# Altium PCB ECG_NEMO_final.PcbDoc (part 2 of 2)
Units mm, origin at the board's own origin, x right, y up, seen from the top; angles counter-clockwise.
Board outline 221.18 x 156.18 mm, 4 copper layers (Top Layer, Signal Layer 1, Signal Layer 2, Bottom Layer), stack 0.778 mm thick; 203 components, 106 nets, 642 pads, 55 vias.
Unrouted connection lines stored in the file: 130.
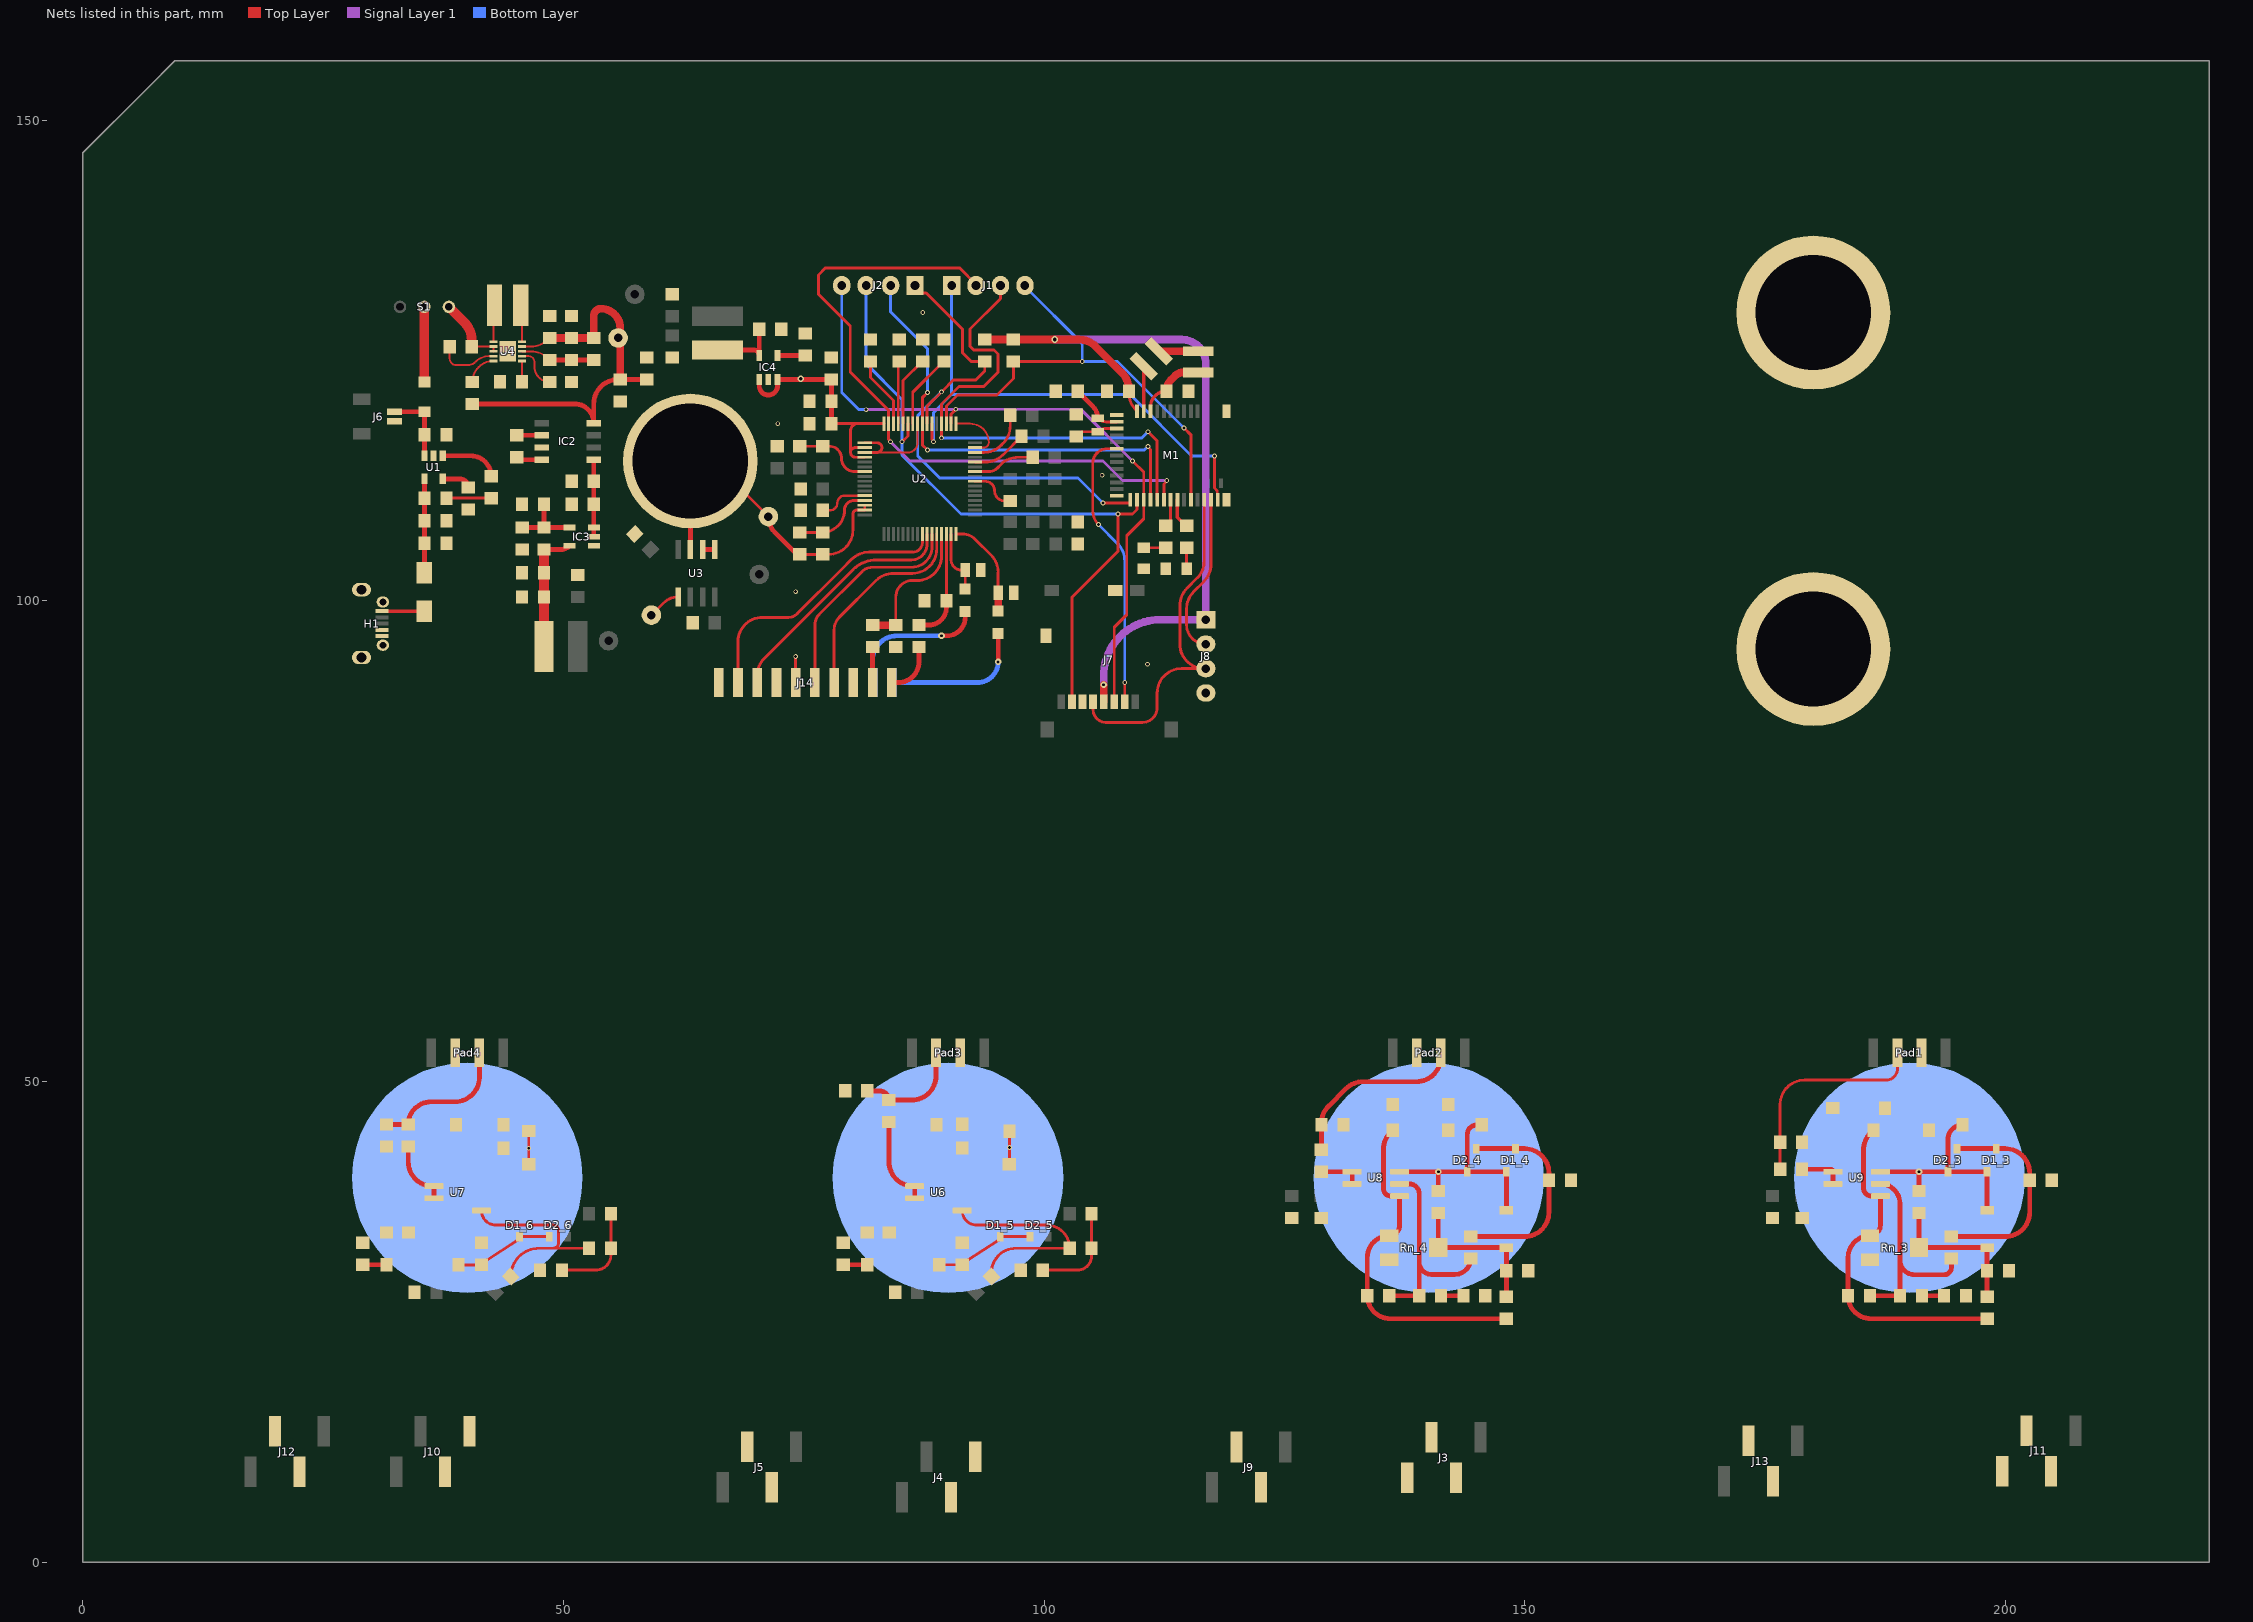
[diagram p3: the nets of this part, all layers, seen from the top]

## Via types
v1: diameter 0.5, hole 0.3, Top Layer to Bottom Layer, 24 vias
v2: diameter 0.5, hole 0.3, Signal Layer 1 to Bottom Layer, 10 vias
v3: diameter 0.5, hole 0.3, Top Layer to Signal Layer 1, 9 vias
v4: diameter 0.7, hole 0.3, Top Layer to Bottom Layer, 6 vias
v5: diameter 0.7, hole 0.4, Top Layer to Signal Layer 1, 3 vias
v6: diameter 0.7, hole 0.4, Top Layer to Bottom Layer, 1 vias
v7: diameter 0.7, hole 0.3, Top Layer to Signal Layer 1, 1 vias
v8: diameter 0.7, hole 0.3, Signal Layer 1 to Bottom Layer, 1 vias

## Nets (pads, with @x,y where several pads share a name; then routed paths per layer and width w, separated by ;. In a path a pad name is that pad's centre, name@x,y a point inside that pad or via, vN(x,y) a via of type N, cw(c..) or ccw(c..) an arc to the next point about the centre after c; other vN are vias at no path point) (continued)
BIAS: C14.2 pad.1 R17.2 TP8.1 U2.62 U2.63 U3.3 | length 35.5
  Top Layer w0.3: pad.1@63.198,114.554 64.471,114.554 cw(c64.471,112.014) 66.267,113.81 TP8.1@71.308,108.769 ; C14.2@74.589,104.848 R17.2@76.964,104.848 77.564,104.848 ccw(c77.564,107.388) 80.104,107.388 80.104,109.042 cw(c80.512,109.042) 80.512,109.45 U2.63@81.336,109.45 U2.62@81.336,109.95
  Top Layer w0.5: U3.3@63.198,105.349 pad.1@63.198,114.554 ; TP8.1@71.308,108.769 ccw(c73.616,108.769) 71.984,107.137 74.049,105.072 ccw(c74.589,105.613) C14.2@74.589,104.848
CS: J2.1 M1.25 R20.1 U2.39 | length 54.5
  Top Layer w0.3: J2.1@86.563,132.817 86.563,132.791 87.313,132.041 87.724,132.041 91.518,128.246 91.518,125.796 92.404,124.909 R20.1@93.821,124.909 93.821,123.922 92.899,123 90.57,123 89.362,121.792 87.824,120.254 U2.39@87.824,118.438 ; v2(106.121,110.185) 108.901,110.185 108.951,110.235 M1.25@108.951,110.536
  Bottom Layer w0.3: v1(89.324,121.754) 86.843,119.273 86.843,115.087 89.129,112.801 103.505,112.801 v2(106.121,110.185)
  other v1: 106.121,110.185
CS_1: J7.2 M1.17 | length 29.3
  Top Layer w0.3: v1(105.639,107.95) cw(c107.049,109.36) 105.054,109.36 105.054,114.342 cw(c106.548,114.342) 106.548,115.836 M1.17@107.551,115.836 ; J7.2@108.382,89.526 v1(108.382,91.516)
  Bottom Layer w0.3: v1(105.639,107.95) 107.638,105.951 cw(c105.842,104.155) 108.382,104.155 v1(108.382,91.516)
  other v2: 105.639,107.95
DRDY: J1.2 M1.30 U2.47 | length 70.5
  Top Layer w0.3: v3(84.023,116.561) 84.023,116.615 83.824,116.814 U2.47@83.824,118.438 83.824,119.808 79.825,123.806 79.825,128.588 76.516,131.897 76.516,133.912 77.224,134.62 91.21,134.62 92.913,132.917 J1.2@92.913,132.817 ; M1.30@112.451,110.536 112.451,112.168 112.751,112.468 v1(112.751,112.522)
  Signal Layer 1 w0.3: v3(84.023,116.561) 86.03,114.554 106.121,114.554 108.153,112.522 v1(112.751,112.522)
  other v2: 112.751,112.522
DVDD: C15.2 C16.2 C30.2 C31.2 C39.2 C40.2 C46.2 C47.2 IC2.8 IC4.1 IC4.3 J7.4 J8.1 M1.11 R15.2 R16.2 R19.2 R20.2 TP7.1 U2.48 U2.50 U2.52 U4.9 | length 149.8
  Top Layer w0.2: U4.9@45.674,126.462 46.629,126.462 ccw(c46.629,129.002) 48.425,127.206 C16.2@48.575,127.356
  Top Layer w0.3: C31.2@77.866,118.438 80.595,118.438 ; U2.52@81.336,114.95 80.358,114.95 cw(c80.358,115.45) 79.858,115.45 ; U2.50@81.336,115.95 80.358,115.95 ccw(c80.358,115.45) 79.858,115.45 ; U2.48@83.324,118.438 80.595,118.438 ; C46.2@108.814,121.96 C46.2@108.814,121.823 108.814,121.625 ccw(c111.354,121.625) 109.558,119.829 M1.11@109.651,119.736 ; 79.858,115.45 79.858,117.701 cw(c80.595,117.701) 80.595,118.438
  Top Layer w0.5: R16.2@40.532,120.498 51.147,120.498 cw(c51.147,118.496) IC2.8@53.149,118.496 53.149,120.498 cw(c55.689,120.498) 55.689,123.038 C40.2@55.895,123.038 C39.2@58.649,123.038 ; IC4.1@70.358,123.038 70.358,122.362 ccw(c71.308,122.362) 71.308,121.412 ccw(c71.308,122.362) 72.258,122.362 IC4.3@72.258,123.038 C30.2@77.866,123.038 C47.2@77.866,120.769 C31.2@77.866,118.438
  Top Layer w0.8: C16.2@48.575,127.356 C15.2@50.83,127.356 R15.2@53.149,127.356 53.149,129.634 cw(c53.911,129.634) 53.911,130.396 cw(c53.911,128.412) 55.895,128.412 C40.2@55.895,123.038 ; R20.2@93.821,127.195 R19.2@96.793,127.195 v5(101.089,127.195) 103.578,127.195 cw(c103.578,124.655) 105.374,126.452 108.07,123.756 cw(c106.274,121.96) C46.2@108.814,121.96 ; J7.4@106.182,89.526 v7(106.182,91.288)
  Signal Layer 1 w0.8: v5(101.089,127.195) 114.275,127.195 cw(c114.275,124.655) 116.815,124.655 J8.1@116.815,98.044 112.039,98.044 ccw(c112.039,92.186) 106.182,92.186 v7(106.182,91.288)
  other v5: 74.678,123.106
Elec_1: C5.2 R5.2 U2.14 | length 11.5
  Top Layer w0.3: C5.2@89.824,100.025 U2.14@89.824,106.962
  Top Layer w0.5: R5.2@86.974,97.485 88,97.485 ccw(c88,99.308) 89.824,99.308 C5.2@89.824,100.025
Elec_2: C6.2 R6.2 U2.13 | length 14.8
  Top Layer w0.3: C6.2@84.562,97.485 84.562,100.406 cw(c86.284,100.406) 86.284,102.128 86.784,102.128 ccw(c86.784,104.668) 89.324,104.668 U2.13@89.324,106.962
  Top Layer w0.8: R6.2@82.149,97.485 C6.2@84.562,97.485
Elec_3: C7.2 J14.7 Pad1.3 R7.2 U2.12 | length 44.6
  Top Layer w0.3: J14.7@78.149,91.516 78.149,96.994 cw(c79.993,96.994) 78.689,98.298 82.519,102.128 cw(c84.315,100.332) 84.315,102.872 86.284,102.872 ccw(c86.284,105.412) 88.824,105.412 U2.12@88.824,106.962 ; R7.2@176.547,40.889 C7.2@176.547,43.688 176.547,47.625 cw(c179.087,47.625) 179.087,50.165 187.554,50.165 ccw(c187.554,51.361) 188.75,51.361 Pad1.3@188.75,53
Elec_4: C8.2 J14.9 Pad2.2 R8.2 U2.11 | length 42.7
  Top Layer w0.3: J14.9@76.149,91.516 76.149,97.529 cw(c77.642,97.529) 76.586,98.585 81.069,103.068 cw(c82.125,102.012) 82.125,103.505 86.216,103.505 ccw(c86.216,105.613) 88.324,105.613 U2.11@88.324,106.962
  Top Layer w0.5: R8.2@128.833,42.921 C8.2@128.833,45.5 128.833,45.662 cw(c131.373,45.662) 129.577,47.458 131.375,49.256 cw(c133.171,47.46) 133.171,50 138.71,50 ccw(c138.71,52.54) 141.25,52.54 Pad2.2@141.25,53
Elec_5: C63.2 J14.15 Pad3.3 R27.2 U2.10 | length 37.3
  Top Layer w0.3: J14.15@70.149,91.516 70.149,92.236 cw(c72.689,92.236) 70.893,94.033 80.13,103.269 cw(c82.539,100.86) 82.539,104.267 86.166,104.267 ccw(c86.166,105.925) 87.824,105.925 U2.10@87.824,106.962
  Top Layer w0.5: C63.2@81.592,49.04 82.892,49.04 cw(c82.892,48.081) R27.2@83.851,48.081 86.21,48.081 ccw(c86.21,50.621) 88.75,50.621 Pad3.3@88.75,53
Elec_6: C64.2 J14.17 Pad4.2 R28.2 U2.9 | length 44
  Top Layer w0.3: J14.17@68.149,91.516 68.149,95.758 cw(c70.689,95.758) 70.689,98.298 73.399,98.298 ccw(c73.399,99.603) 74.323,98.68 78.901,103.259 79.97,104.328 cw(c81.766,102.532) 81.766,105.072 86.317,105.072 ccw(c86.317,106.078) 87.324,106.077 U2.9@87.324,106.962
  Top Layer w0.5: C64.2@31.592,45.541 R28.2@33.851,45.541 cw(c36.213,45.541) 36.213,47.903 38.71,47.903 ccw(c38.71,50.443) 41.25,50.443 Pad4.2@41.25,53
Elec_7: C52.2 R3.1 U2.16 | length 10.5
  Top Layer w0.3: U2.16@90.824,106.962 91.518,106.962 cw(c91.518,105.132) 92.812,106.426 94.47,104.768 cw(c92.674,102.972) 95.214,102.972 C52.2@95.214,100.86
  Top Layer w0.8: R3.1@95.214,98.965 C52.2@95.214,100.86
Elec_8: C67.2 R4.1 U2.15 | length 6.7
  Top Layer w0.3: U2.15@90.324,106.962 90.324,104.266 ccw(c91.364,104.266) 91.364,103.226 C67.2@91.784,103.226 R4.1@91.784,101.251
GND: C1.1 C1_3.2 C1_4.2 C1_5.2 C1_6.2 C2.1 C3.1 C4.1 C5.1 C6.1 C7.1 C8.1 C9.1 C10.1 C11.1 C12.2 C13.1 C15.1 C16.1 C17.1 C18.1 C19.1 C28.1 C29.1 C30.1 C31.1 C34.1 C35.1 C37.2 C38.1 C39.1 C40.1 C41.1 C42.1 C43.1 C44.1 C45.1 C46.1 C47.1 C48.1 C49.1 C50.1 C51.1 C52.1 C53.1 C54.1 C57.1 C58.1 C61.1 C62.1 C63.1 C64.1 C65.1 C66.1 C67.1 C69.1 C70.1 C73.1 C74.1 C75.1 C79.1 H1.4 H1.5 IC2.3 IC3.1 IC4.2 J6.2 J7.6 J7.DL J7.DS J8.4 J14.5 J14.11 J14.13 J14.19 LED2.K LED3.K M1.1 M1.12 M1.24 M1.39 Pad1.2 Pad2.3 Pad3.2 Pad4.3 R2.1 R3_3.1 R3_4.1 R9.2 R11.2 R12.2 R13.2 R14.2 R18.1 R23.1 R25.1 R29.2 Rb_3.1 Rb_4.1 Rb_5.1 Rb_6.1 Rn2.1 Rn2_3.1 Rn2_4.1 Rn2_5.1 Rn_3.3 Rn_4.3 U1.2 U2.31 U2.33 U2.41 U2.49 U2.51 U4.4 U4.7 U4.11 | length 31
  Top Layer w0.2: C17.1@38.163,126.462 38.163,125.211 ccw(c38.837,125.211) 38.837,124.537 40.024,124.537 ccw(c40.024,125.732) 40.869,124.887 cw(c42.257,123.498) 42.257,125.462 U4.4@42.724,125.462 ; U4.7@45.674,125.462 46.39,125.462 cw(c46.39,124.887) 46.965,124.887 46.965,124.394 ccw(c48.575,124.394) R18.1@48.575,122.784 ; 82.616,115.45 85.824,115.45 ccw(c85.824,116.45) 86.824,116.45 U2.41@86.824,118.438 ; U2.33@90.824,118.438 92.295,118.438 cw(c92.295,116.495) 94.238,116.495 cw(c93.692,116.495) 93.692,115.95 U2.31@92.812,115.95
  Top Layer w0.3: J14.11@74.149,91.516 v1(74.149,94.228) ; U2.51@81.336,115.45 82.616,115.45 ccw(c82.616,115.95) 83.116,115.95 ccw(c82.616,115.95) 82.616,116.45 U2.49@81.336,116.45
  other v1: 110.732,93.416 74.149,100.964 106.028,113.072 72.283,118.438 87.37,130
GUARD_3: J11.2 R1_3.1 R2_3.2 Rc_3.1 U9.2 | length 23.5
  Top Layer w0.5: R1_3.1@185.892,27.737 R2_3.2@189,27.737 189,31.447 ; U9.2@186.97,39.365 cw(c186.97,37.335) 189,37.335 189,31.447 ; Rc_3.1@194.36,31.598 194.36,30.682 cw(c193.599,30.682) 193.599,29.921 190.525,29.921 cw(c190.525,31.447) 189,31.447
GUARD_4: J3.2 R1_4.1 R2_4.2 Rc_4.1 U8.2 | length 23.4
  Top Layer w0.5: R1_4.1@135.892,27.737 R2_4.2@139,27.737 139,31.243 ; U8.2@136.97,39.365 137.984,39.365 cw(c137.984,38.349) 139,38.349 139,31.243 ; Rc_4.1@144.36,31.598 cw(c142.709,31.598) 142.709,29.947 140.296,29.947 cw(c140.296,31.243) 139,31.243
GUARD_5: R24.1
GUARD_6: R26.1
MISO: J2.3 J7.7 M1.26 U2.43 | length 71
  Top Layer w0.3: v1(85.217,116.561) 85.824,117.167 U2.43@85.824,118.438 ; J7.7@102.882,89.526 102.882,100.384 107.671,105.173 v1(107.671,109.05) 109.191,109.05 109.651,109.51 M1.26@109.651,110.536
  Bottom Layer w0.3: J2.3@81.483,132.817 81.483,124.669 85.217,120.935 v1(85.217,116.561) 85.217,115.164 91.331,109.05 v1(107.671,109.05)
  other v2: 107.671,109.05
  other v3: 85.217,116.561
MOSI: J2.4 J7.3 M1.27 U2.34 | length 72.9
  Top Layer w0.3: U2.34@90.324,118.438 90.324,119.457 v2(90.805,119.939) ; J7.3@107.282,89.526 107.282,97.274 108.582,98.574 108.582,106.784 110.351,108.554 110.351,113.398 v3(109.195,114.554)
  Signal Layer 1 w0.3: v2(81.483,119.898) 90.764,119.898 v2(90.805,119.939) 103.81,119.939 v3(109.195,114.554)
  Bottom Layer w0.3: J2.4@78.943,132.817 78.943,121.666 80.712,119.898 v2(81.483,119.898)
  other v3: 90.805,119.939
NetC1_3_1: C1_3.1 R2_3.1 | length 2.3
  Top Layer w0.5: R2_3.1@191.286,27.737 C1_3.1@193.598,27.737
NetC1_4_1: C1_4.1 R2_4.1 | length 2.3
  Top Layer w0.5: R2_4.1@141.286,27.737 C1_4.1@143.598,27.737
NetC1_5_1: C1_5.1 R2_5.1 | length 2.5
  Top Layer w0.5: C1_5.1@79.108,30.96 R2_5.1@81.592,30.96
NetC1_6_1: C1_6.1 R2_6.1 | length 2.5
  Top Layer w0.5: C1_6.1@29.108,30.951 31.592,30.951 R2_6.1@31.592,30.96
NetC9_2: C9.2 C10.2 D2.1 LED1.1 U1.4 | length 9.8
  Top Layer w0.5: D2.1@35.531,102.946 C10.2@35.531,105.994 C9.2@35.531,108.33 LED1.1@35.531,110.693 U1.4@35.531,112.699
NetC11_2: C11.2 D1.2 J6.1 U1.3 | length 7.7
  Top Layer w0.5: J6.1@32.415,119.68 32.415,119.684 D1.2@35.531,119.684 C11.2@35.531,117.308 U1.3@35.531,115.099
NetC14_1: C14.1 R17.1 U2.61 | length 8.6
  Top Layer w0.3: C14.1@74.589,107.134 76.912,107.134 ccw(c76.912,109.45) 79.228,109.45 cw(c80.228,109.45) 80.228,110.45 U2.61@81.336,110.45
NetC18_2: C18.2 U4.6 | length 2.2
  Top Layer w0.2: C18.2@45.674,122.784 U4.6@45.674,124.962
NetC19_2: C19.2 R15.1 R18.2 U4.8 | length 7.7
  Top Layer w0.2: U4.8@45.674,125.962 46.631,125.962 cw(c46.631,123.422) 48.427,125.218 R18.2@48.575,125.07
  Top Layer w0.5: R18.2@48.575,125.07 C19.2@50.83,125.07 R15.1@53.149,125.07
NetC20_1: C20.1 U2.24 | length 4.8
  Top Layer w0.3: U2.24@92.812,112.45 93.844,112.45 cw(c93.844,111.45) 94.844,111.45 ccw(c95.884,111.45) 95.884,110.41 C20.1@96.469,110.41
NetC21_2: C21.2 U2.30 | length 6.3
  Top Layer w0.3: U2.30@92.812,115.45 93.727,115.45 ccw(c93.727,117.99) 95.523,116.194 95.725,116.396 ccw(c93.929,118.192) 96.469,118.192 C21.2@96.469,119.305
NetC22_1: C22.1 U2.28 | length 5.8
  Top Layer w0.3: U2.28@92.812,114.45 93.912,114.45 ccw(c93.912,116.99) 95.708,115.194 C22.1@97.637,117.123
NetC23_2: C23.2 U2.26 | length 6.4
  Top Layer w0.3: U2.26@92.812,113.45 94.238,113.45 ccw(c94.238,114.679) 95.107,113.81 95.494,114.197 cw(c97.291,112.401) 97.291,114.941 C23.2@98.805,114.941
NetC24_2: C24.2 C25.2 U2.55 | length 8.3
  Top Layer w0.3: C25.2@74.589,116.096 C24.2@76.964,116.096 77.65,116.096 cw(c77.65,114.834) 78.911,114.834 ccw(c80.296,114.834) 80.296,113.45 U2.55@81.336,113.45
NetC36_1: C36.1 IC2.2 | length 2.6
  Top Layer w0.5: C36.1@45.129,117.226 IC2.2@47.727,117.226
NetC36_2: C36.2 IC2.4 | length 2.7
  Top Layer w0.5: C36.2@45.129,114.94 ccw(c45.383,114.94) 45.383,114.686 IC2.4@47.727,114.686
NetC37_1: C37.1 IC3.4 R1.1 R2.2 | length 7.4
  Top Layer w0.5: C37.1@45.713,107.635 R1.1@47.974,107.635 ; R2.2@47.974,110.078 R1.1@47.974,107.635 ; IC3.4@50.649,107.635 R1.1@47.974,107.635
NetC38_2: C38.2 L3.2 M1.9 | length 7.4
  Top Layer w0.35: M1.9@111.051,119.736 111.051,120.166 cw(c112.708,120.166) C38.2@112.708,121.823
  Top Layer w0.8: C38.2@112.708,121.823 cw(c114.372,121.823) 113.196,123 113.64,123.444 cw(c114.418,122.666) 114.418,123.766 L3.2@116.013,123.766
NetC41_2: C41.2 C42.2 IC2.5 IC3.2 IC3.3 | length 8
  Top Layer w0.5: IC3.2@53.149,106.685 IC3.3@53.149,107.635 C42.2@53.149,110.078 C41.2@53.149,112.44 IC2.5@53.149,114.686
NetC43_2: C43.2 C44.2 IC3.5 L2.1 R1.2 | length 12.9
  Top Layer w0.5: R1.2@47.974,105.349 49.717,105.349 ccw(c49.717,106.667) IC3.5@50.649,105.735
  Top Layer w1: L2.1@47.974,95.275 C44.2@47.974,100.411 C43.2@47.974,102.912 R1.2@47.974,105.349
NetC48_2: C48.2 IC4.5 L5.1 | length 7.4
  Top Layer w0.5: L5.1@66.015,126.111 69.784,126.111 cw(c69.784,125.538) IC4.5@70.358,125.538 C48.2@70.358,128.27
NetC51_2: C51.2 IC4.4 | length 2.9
  Top Layer w0.5: IC4.4@72.258,125.538 C51.2@75.159,125.538
NetC53_2: C53.2 M1.13 X1.2 | length 5.7
  Top Layer w0.305: X1.2@105.571,119.002 ccw(c106.455,119.887) 106.455,118.636 M1.13@107.551,118.636
  Top Layer w0.5: C53.2@103.48,121.823 105.054,120.248 cw(c103.808,119.002) X1.2@105.571,119.002
NetC54_2: C54.2 M1.14 X1.1 | length 4.5
  Top Layer w0.305: C54.2@103.335,117.094 103.399,117.094 103.907,117.602 X1.1@105.571,117.602 cw(c106.376,116.797) 106.376,117.936 M1.14@107.551,117.936
NetCn_1: Cn.1 Rn1.1 Rn2.2 | length 10.3
  Top Layer w0.3: Rn2.2@49.852,30.392 53.348,30.392 ccw(c53.348,31.976) 54.932,31.976 Rn1.1@54.932,32.678 Cn.1@54.932,36.276
NetCn_3_1: Cn_3.1 Cn_3a.2 Rn1_3.1 Rn2_3.2 Rn_3.2 | length 15.8
  Top Layer w0.5: Cn_3.1@190.992,36.349 Rn_3.2@190.992,32.741 Cn_3a.2@198.068,32.741 Rn2_3.2@198.068,30.344 Rn1_3.1@198.068,27.635
NetCn_4_1: Cn_4.1 Cn_4a.2 Rn1_4.1 Rn2_4.2 Rn_4.2 | length 15.8
  Top Layer w0.5: Cn_4.1@140.992,36.349 Rn_4.2@140.992,32.741 Cn_4a.2@148.068,32.741 Rn2_4.2@148.068,30.344 Rn1_4.1@148.068,27.635
NetCn_5_1: Cn_5.1 Rn1_5.1 Rn2_5.2 | length 10.3
  Top Layer w0.3: Rn2_5.2@99.852,30.392 103.447,30.392 ccw(c103.447,31.877) 104.932,31.877 Rn1_5.1@104.932,32.678 Cn_5.1@104.932,36.276
NetD1_1: D1.1 S1.2 | length 7.8
  Top Layer w1: D1.1@35.531,122.784 S1.2@35.531,130.593
NetD1_3_3: D1_3.3 D2_3.1 Rb_3.2 Rc_3.2 | length 22.7
  Top Layer w0.5: Rc_3.2@194.36,33.884 199.96,33.884 ccw(c199.96,36.424) 202.5,36.424 Rb_3.2@202.5,39.75 202.5,40.495 ccw(c199.96,40.495) 199.96,43.035 D1_3.3@199.018,43.035 D2_3.1@194.95,43.035
NetD1_4_3: D1_4.3 D2_4.1 Rb_4.2 Rc_4.2 | length 22.7
  Top Layer w0.5: Rc_4.2@144.36,33.884 149.96,33.884 ccw(c149.96,36.424) 152.5,36.424 Rb_4.2@152.5,39.75 152.5,40.495 ccw(c149.96,40.495) 149.96,43.035 D1_4.3@149.018,43.035 D2_4.1@144.95,43.035
NetD1_5_3: D1_5.3 D2_5.1 Rb_5.2 Rc_5.2 | length 10.4
  Top Layer w0.3: Rc_5.2@89.081,30.96 Rb_5.2@91.47,30.96 92.019,31.445 95.231,33.526 D1_5.3@95.431,33.876 D2_5.1@98.52,33.876
NetD1_6_3: D1_6.3 D2_6.1 Rb_6.2 Rc_6.2 | length 10.4
  Top Layer w0.3: Rc_6.2@39.081,30.951 Rb_6.2@41.47,30.951 42.018,31.436 45.231,33.526 D1_6.3@45.431,33.876 D2_6.1@48.52,33.876
NetD2_2: D2.2 H1.1 | length 4.4
  Top Layer w0.35: H1.1@31.115,98.946 D2.2@35.531,98.946
NetL1_1: L1.1 U4.1 | length 3.9
  Top Layer w0.2: U4.1@42.724,126.962 42.724,130.667 cw(c42.827,130.667) L1.1@42.827,130.77
NetL1_2: L1.2 U4.10 | length 3.9
  Top Layer w0.2: L1.2@45.539,130.771 cw(c45.539,130.635) 45.674,130.635 U4.10@45.674,126.962
NetL3_1: L3.1 L4.2 | length 4.1
  Top Layer w0.8: L4.2@111.907,125.966 L3.1@116.013,125.966
NetL4_1: L4.1 M1.10 | length 4.7
  Top Layer w0.35: M1.10@110.351,119.736 L4.1@110.351,124.411
NetLED1_2: LED1.2 R10.1 | length 4.7
  Top Layer w0.3: LED1.2@37.817,110.693 R10.1@42.477,110.693
NetLED2_A: LED2.A R21.2 | length 2.2
  Top Layer w0.3: LED2.A@114.811,103.353 R21.2@114.811,105.537
NetLED3_A: LED3.A R22.2 | length 2.3
  Top Layer w0.3: LED3.A@110.351,105.537 R22.2@112.627,105.537
NetM1_31: M1.31 R22.1 | length 3
  Top Layer w0.3: R22.1@112.627,107.823 112.666,107.823 113.151,108.308 M1.31@113.151,110.536
NetM1_32: M1.32 R21.1 | length 3.1
  Top Layer w0.35: M1.32@113.851,110.536 113.851,108.72 114.748,107.823 R21.1@114.811,107.823
NetR9_1: R9.1 U1.5 | length 3.2
  Top Layer w0.5: U1.5@37.431,112.699 39.207,112.699 cw(c39.207,111.81) R9.1@40.096,111.81
NetR10_2: R10.2 U1.1 | length 6.3
  Top Layer w0.5: U1.1@37.431,115.099 40.356,115.099 cw(c40.356,112.979) R10.2@42.477,112.979
NetR11_1: R11.1 U2.46 | length 7.5
  Top Layer w0.3: R11.1@81.934,124.909 81.934,123.233 84.324,120.844 U2.46@84.324,118.438
NetR12_1: R12.1 U2.45 | length 6.5
  Top Layer w0.3: U2.45@84.824,118.438 84.824,124.827 R12.1@84.906,124.909
NetR13_1: R13.1 U2.44 | length 7.4
  Top Layer w0.3: U2.44@85.324,118.438 85.324,122.927 87.306,124.909 R13.1@87.37,124.909
NetR14_1: R14.1 U2.42 | length 7.9
  Top Layer w0.3: U2.42@86.324,118.438 86.324,121.717 89.516,124.909 R14.1@89.58,124.909
NetR16_1: R16.1 U4.5 | length 3.4
  Top Layer w0.2: R16.1@40.532,122.784 cw(c42.71,122.784) 42.71,124.962 U4.5@42.724,124.962
NetR29_1: R29.1 U2.60 | length 5.2
  Top Layer w0.254: R29.1@76.964,109.423 77.701,109.423 ccw(c77.701,110.211) 78.488,110.211 cw(c79.228,110.211) 79.228,110.95 U2.60@81.336,110.95
NetU3_1: U3.1 U3.2 | length 1.3
  Top Layer w0.5: U3.2@64.468,105.349 U3.1@65.738,105.349
OUT_A3: C3_3.2 J11.1 R1_3.2 Rn1_3.2 Rn_3.1 U9.1 | length 36.7
  Top Layer w0.5: C3_3.2@186.25,44.964 185.961,44.675 ccw(c187.757,42.879) 185.217,42.879 185.217,38.938 ccw(c186.06,38.938) 186.06,38.095 U9.1@186.97,38.095 186.97,35.069 cw(c185.892,35.069) Rn_3.1@185.892,33.991 ccw(c185.892,31.705) 183.606,31.705 R1_3.2@183.606,27.737 ccw(c185.994,27.737) 185.994,25.349 Rn1_3.2@198.068,25.349
OUT_A4: C3_4.2 J3.1 R1_4.2 Rn1_4.2 Rn_4.1 U8.1 | length 36.6
  Top Layer w0.5: C3_4.2@136.25,44.964 136.024,44.739 ccw(c137.82,42.943) 135.28,42.943 135.28,38.887 ccw(c136.073,38.887) 136.073,38.095 U8.1@136.97,38.095 136.97,35.069 cw(c135.892,35.069) Rn_4.1@135.892,33.991 ccw(c135.892,31.705) 133.606,31.705 R1_4.2@133.606,27.737 ccw(c135.993,27.737) 135.993,25.349 Rn1_4.2@148.068,25.349
OUT_A5: J4.1 J4.2 R1_5.2 Rn1_5.2 U6.1 | length 23.8
  Top Layer w0.3: U6.1@91.47,36.595 ccw(c92.988,36.595) 92.988,35.077 100.247,35.077 cw(c100.247,32.678) Rn1_5.2@102.646,32.678 97.052,32.678 ccw(c97.052,30.138) 94.512,30.138 R1_5.2@94.512,29.723 R1_5.2@94.512,29.32
OUT_A6: J10.1 J10.2 R1_6.2 Rn1.2 U7.1 | length 21.2
  Top Layer w0.3: U7.1@41.47,36.595 ccw(c42.989,36.595) 42.989,35.076 48.962,35.076 cw(c48.962,34.568) 49.47,34.568 49.47,33.186 cw(c48.962,33.186) 48.962,32.678 ; R1_6.2@44.512,29.723 cw(c47.468,29.723) 47.468,32.678 Rn1.2@52.646,32.678
PWDN: J1.4 M1.34 R19.1 U2.35 | length 50.5
  Top Layer w0.3: U2.35@89.824,118.438 89.824,120.269 90.988,121.434 95.077,121.434 96.793,123.15 R19.1@96.793,124.909 v1(103.955,124.909) ; v1(114.554,117.983) 115.251,117.286 M1.34@115.251,110.536
  Bottom Layer w0.3: J1.4@97.993,132.817 97.993,132.717 103.955,126.755 v1(103.955,124.909) 107.628,124.909 v1(114.554,117.983)
  other v3: 114.554,117.983
REF_IN: TP6.1 U3.5 | length 3.5
  Top Layer w0.3: TP6.1@59.142,98.524 60.412,99.794 cw(c61.928,98.278) U3.5@61.928,100.422
RESET: J1.3 M1.29 U2.36 | length 52.7
  Top Layer w0.3: v3(89.324,116.967) U2.36@89.324,118.438 89.324,120.477 91.15,122.303 93.714,122.303 95.191,123.781 95.191,125.682 94.763,126.111 92.674,126.111 92.295,126.489 92.295,128.284 95.453,131.442 J1.3@95.453,132.817 ; v2(110.795,117.602) 111.751,116.646 M1.29@111.751,110.536
  Bottom Layer w0.3: v3(89.324,116.967) 110.16,116.967 v2(110.795,117.602)
  other v1: 89.324,116.967 110.795,117.602
SCK: J2.2 M1.28 U2.40 | length 47.9
  Top Layer w0.3: v1(87.859,115.697) 87.324,116.232 U2.40@87.324,118.438 87.324,121.131 v3(87.859,121.666) ; v1(110.795,116.078) 110.795,116.024 111.051,115.768 M1.28@111.051,110.536
  Bottom Layer w0.3: J2.2@84.023,132.817 84.023,130.073 87.859,126.238 v3(87.859,121.666) ; v1(87.859,115.697) 110.414,115.697 v1(110.795,116.078)
  other v1: 87.859,121.666
  other v2: 110.795,116.078
  other v3: 87.859,115.697
Signal_1: J14.1 pad.1P R5.1 | length 5.6
  Top Layer w0.5: J14.1@84.149,91.516 84.824,91.516 ccw(c84.824,93.667) 86.974,93.667 R5.1@86.974,95.199
Signal_2: J14.3 pad.1N R6.1 | length 3.7
  Top Layer w0.5: J14.3@82.149,91.516 R6.1@82.149,95.199
Signal_3: C_test3.1 Cn_3.2 Cn_3a.1 D1_3.1 D2_3.3 J11.3 pad.2P U9.3 | length 22.8
  Top Layer w0.5: U9.3@186.97,40.635 v4(190.992,40.635) ; Cn_3.2@190.992,38.635 v4(190.992,40.635) ; C_test3.1@195.5,45.5 ccw(c195.5,44) 194,44 D2_3.3@194,40.635 ; Cn_3a.1@198.068,36.641 D1_3.1@198.068,40.635 D2_3.3@194,40.635 ; v4(190.992,40.635) D2_3.3@194,40.635
Signal_3_1: J13.2 J13.3 R7.1 U9.6 U9.7 | length 4.6
  Top Layer w0.5: R7.1@178.833,40.889 181.776,40.889 cw(c181.776,40.635) U9.6@182.03,40.635 U9.7@182.03,39.365
Signal_4: C_test4.1 Cn_4.2 Cn_4a.1 D1_4.1 D2_4.3 J3.3 pad.2N U8.3 | length 23
  Top Layer w0.5: U8.3@136.97,40.635 v4(140.992,40.635) ; Cn_4.2@140.992,38.635 v4(140.992,40.635) ; C_test4.1@145.5,45.5 145,45.5 ccw(c145,44.5) 144,44.5 D2_4.3@144,40.635 ; Cn_4a.1@148.068,36.641 D1_4.1@148.068,40.635 D2_4.3@144,40.635 ; v4(140.992,40.635) D2_4.3@144,40.635
Signal_4_1: J9.2 J9.3 R8.1 U8.6 U8.7 | length 4.5
  Top Layer w0.5: R8.1@128.833,40.635 U8.6@132.03,40.635 U8.7@132.03,39.365
Signal_5: C55.1 C_test5.2 pad.3P | length 3.4
  Top Layer w0.3: C55.1@96.381,41.421 v1(96.381,43.138) C_test5.2@96.381,44.855
Signal_5_1: J5.2 J5.3 R27.1 U6.6 U6.7 | length 9.5
  Top Layer w0.5: R27.1@83.851,45.795 83.851,41.675 ccw(c86.391,41.675) 86.391,39.135 U6.6@86.53,39.135 U6.7@86.53,37.865
Signal_6: C59.2 C_test6.2 pad.3N | length 3.4
  Top Layer w0.254: C59.2@46.381,41.421 C_test6.2@46.381,44.855
  other v1: 46.381,43.077
Signal_6_1: J12.2 J12.3 R28.1 U7.6 U7.7 | length 7
  Top Layer w0.5: R28.1@33.851,43.255 33.851,41.675 ccw(c36.391,41.675) 36.391,39.135 U7.6@36.53,39.135 U7.7@36.53,37.865
Signal_7: J14.2 R3.2 | length 15.2
  Top Layer w0.5: v4(95.214,93.667) R3.2@95.214,96.615
  Bottom Layer w0.5: J14.2@84.149,91.516 93.063,91.516 ccw(c93.063,93.667) v4(95.214,93.667)
Signal_8: J14.4 R4.2 | length 15.1
  Top Layer w0.5: v4(89.324,96.376) 89.862,96.376 ccw(c89.862,98.298) 91.784,98.298 R4.2@91.784,98.901
  Bottom Layer w0.5: J14.4@82.149,91.516 82.149,93.836 cw(c84.689,93.836) 84.689,96.376 v4(89.324,96.376)
START: J1.1 M1.38 U2.38 | length 53.6
  Top Layer w0.3: U2.38@88.324,118.438 88.324,116.785 88.494,116.615 v2(88.494,116.561) ; v3(117.704,115.087) 117.704,111.738 118.001,111.441 118.001,110.586 M1.38@118.051,110.536
  Bottom Layer w0.3: v2(88.494,116.561) 88.494,119.583 90.373,121.463 ; J1.1@90.373,132.817 90.373,121.463 ; v3(117.704,115.087) 115.316,115.087 108.941,121.463 90.373,121.463
  other v1: 117.704,115.087 88.494,116.561
SWD_CLK: J7.5 J8.3 M1.36 | length 37
  Top Layer w0.3: J7.5@105.082,89.526 105.082,88.695 ccw(c106.401,88.695) 106.401,87.376 110.227,87.376 ccw(c110.227,88.9) 111.751,88.9 111.751,90.424 cw(c114.291,90.424) 114.291,92.964 J8.3@116.651,92.964 ; M1.36@116.651,110.536 116.651,104.176 cw(c114.111,104.176) 115.907,102.38 114.855,101.327 ccw(c116.651,99.531) 114.111,99.531 114.111,95.504 ccw(c116.651,95.504) J8.3@116.651,92.964 ; J8.3@116.815,92.964 J8.3@116.651,92.964
SWDIO: J8.2 M1.37 | length 17
  Top Layer w0.3: J8.2@116.815,95.504 cw(c116.815,97.508) 114.811,97.508 114.811,99.179 cw(c117.351,99.179) 115.555,100.975 116.607,102.027 ccw(c114.811,103.824) 117.351,103.824 M1.37@117.351,110.536
VCC: C17.2 S1.3 U4.2 U4.3 | length 7.8
  Top Layer w0.2: C17.2@40.449,126.462 U4.2@42.724,126.462 U4.3@42.724,125.962
  Top Layer w1: S1.3@38.071,130.593 39.705,128.959 cw(c37.909,127.163) 40.449,127.163 C17.2@40.449,126.462
pads on no net: C_test3.2 C_test4.2 C_test5.1 C_test6.1 D1_3.2 D1_4.2 D1_5.2 D1_6.2 D2_3.2 D2_4.2 D2_5.2 D2_6.2 H1.2 H1.3 IC2.1 IC2.6 IC2.7 J6.0 J7.1 J7.8 J7.SM1 J7.SM2 J7.SM3 J7.SM4 M1.2 M1.3 M1.4 M1.5 M1.6 M1.7 M1.8 M1.15 M1.16 M1.18 M1.19 M1.20 M1.21 M1.22 M1.23 M1.33 M1.35 M1.40 M1.41 S1.1 U2.1 U2.2 U2.3 U2.4 U2.5 U2.6 U2.7 U2.8 U2.18 U2.27 U2.29 U2.37 U2.64
copper on no net: | length 351.9
  Bottom Layer w2: 54,40 ccw(c40,40) 54,40 ; 104,40 ccw(c90,40) 104,40 ; 154,40 ccw(c140,40) 154,40 ; 204,40 ccw(c190,40) 204,40

## Polygon pours and split planes (outlines as drawn)
GND on Top Layer "GND_L01_P001" (solid, remove dead copper, pour order 1): 30.888,135.89 ccw(c30.888,130.58) 25.578,130.58 25.578,90.043 ccw(c30.886,90.043) 30.886,84.734 119.456,84.734 119.456,135.89 61.443,135.89
GND on Top Layer "GND_L01_P027" (solid, remove dead copper, pour order 27): 177.126,57 ccw(c177.126,53) 173.126,53 173.126,27 ccw(c177.126,27) 177.126,23 203.126,23 ccw(c203.126,27) 207.126,27 207.126,53 ccw(c203.126,53) 203.126,57 179.126,57
GND on Top Layer "GND_L01_P026" (solid, remove dead copper, pour order 26): 127.126,57 ccw(c127.126,53) 123.126,53 123.126,27 ccw(c127.126,27) 127.126,23 153.126,23 ccw(c153.126,27) 157.126,27 157.126,53 ccw(c153.126,53) 153.126,57 129.126,57
GND on Top Layer "GND_L01_P025" (solid, remove dead copper, pour order 25): 77.126,57 ccw(c77.126,53) 73.126,53 73.126,27 ccw(c77.126,27) 77.126,23 103.126,23 ccw(c103.126,27) 107.126,27 107.126,53 ccw(c103.126,53) 103.126,57 79.126,57
GND on Top Layer "GND_L01_P023" (solid, remove dead copper, pour order 23): 27,57 ccw(c27,53) 23,53 23,27 ccw(c27,27) 27,23 53,23 ccw(c53,27) 57,27 57,53 ccw(c53,53) 53,57 29,57
DVDD on Top Layer "DVDD_L01_P018" (solid, pour order 18): 108.828,119.669 109.307,119.19 ccw(c109.45,119.333) 109.45,119.13 109.85,119.13 109.85,121.829 ccw(c107.31,121.829) 109.106,123.625 105.651,127.08 ccw(c103.855,125.284) 103.855,127.824 93.116,127.824 93.116,126.568 103.49,126.568 cw(c103.49,124.028) 105.286,125.824 107.887,123.223 cw(c107.185,122.522) 108.178,122.522 108.178,121.365 ccw(c110.718,121.365)
-2.5V on Top Layer "-2.5V_L01_P015" (solid, pour order 15): 102.848,114.829 cw(c102.848,114.197) 103.48,114.197 103.48,112.645 cw(c102.918,112.645) 102.918,112.083 101.98,112.083 ccw(c101.98,112.059) 101.957,112.059 95.778,112.059 95.778,113.325 100.058,113.325 ccw(c100.058,113.721) 100.455,113.721 100.455,115.635 ccw(c99.665,115.635) 99.665,116.424 99.288,116.424 99.288,117.821 ccw(c98.504,117.821) 98.504,118.605 98.119,118.605 98.119,120.002 99.388,120.002 cw(c99.388,117.598) 101.791,117.598 101.791,114.829
+2.5V on Top Layer "+2.5V_L01_P010" (solid, pour order 10): 62.921,101.41 cw(c64.632,101.41) 64.632,103.121 67.749,103.121 67.749,102.623 ccw(c67.749,101.245) 66.371,101.245 66.371,97.029 65.1,97.029 65.1,98.425 ccw(c64.095,98.425) 64.095,99.431 62.918,99.431
-2.5V on Top Layer "-2.5V_L01_P009" (solid, pour order 9): 54.563,101.782 cw(c52.767,103.578) 52.767,101.038 50.807,101.038 ccw(c50.775,100.874) 50.775,101.041 50.775,100.558 cw(c49.734,100.558) 50.47,99.822 50.47,92.634 52.502,92.634 ccw(c52.502,95.174) 55.042,95.174 55.042,96.475 ccw(c52.787,96.475) 54.381,98.069 54.333,98.118 cw(c55.352,99.137) 53.911,99.137 cw(c54.517,99.137) 54.088,99.565 54.944,100.422 57.469,102.916 58.178,103.625 cw(c59.974,101.829) 59.974,104.369 62.205,104.369 62.205,106.324 59.142,106.324 ccw(c59.142,106.238) 59.08,106.299
-2.5V on Top Layer "-2.5V_L01_P008" (solid, pour order 8): 95.778,105.136 ccw(c97.409,105.136) 97.409,103.505 100.199,103.505 ccw(c100.199,105.136) 101.83,105.136 101.83,106.629 95.778,106.629
DVDD on Top Layer "DVDD_L01_P005" (solid, pour order 5): 71.958,123.671 71.958,122.54 72.258,122.54 72.258,122.362 cw(c71.308,122.362) 71.308,121.412 cw(c71.308,122.362) 70.358,122.362 70.457,122.462 70.689,122.462 70.689,123.673 55.895,123.673 55.895,128.412 ccw(c53.911,128.412) 53.911,130.396 ccw(c53.911,129.634) 53.149,129.634 53.149,127.356 ccw(c53.784,127.356) 53.784,126.721 53.848,126.721 cw(c53.848,125.527) 55.042,125.527 55.042,123.673 ccw(c55.042,121.133) 52.502,121.133 41.224,121.133 41.224,119.863 50.697,119.863 cw(c50.697,118.173) 52.387,118.173 53.911,118.173 53.911,120.98 cw(c55.393,120.98) 55.393,122.462 69.784,122.462 ccw(c71.266,122.462) 71.266,120.98 71.308,120.98 ccw(c71.308,122.316) 72.637,122.185 cw(c72.918,122.181) 72.921,122.462 76.227,122.462 cw(c76.227,121.464) 77.224,121.464 77.224,117.728 78.488,117.728 cw(c78.488,116.495) 79.721,116.495 79.721,115.472 cw(c80.199,115.472) 80.199,115.95 80.305,115.95 ccw(c80.305,116.098) 80.453,116.098 cw(c80.453,116.447) 80.104,116.447 80.104,117.255 cw(c80.551,117.255) 80.551,117.701 83.116,117.701 ccw(c83.117,117.908) 83.324,117.908 83.324,119.002 ccw(c83.15,119.002) 83.15,119.175 79.228,119.175 cw(c79.228,119.914) 78.488,119.915 78.488,123.671
+2.5V on Top Layer "+2.5V_L01_P002" (solid, pour order 2): 94.605,108.906 94.561,108.95 93.554,108.95 ccw(c93.554,109.531) 94.135,109.531 93.978,109.688 ccw(c93.685,109.396) 93.685,109.809 94.098,110.222 ccw(c93.877,110.443) 94.19,110.443 94.326,110.443 ccw(c94.701,110.443) 94.436,110.178 95.778,108.836 97.152,108.836 ccw(c97.152,109.779) 98.095,109.779 98.095,111.049 101.83,111.049 101.83,107.514 95.778,107.514
DVDD on Signal Layer 1 "DVDD_L02_P016" (solid, pour order 16): 74.149,123.106 74.149,125.197 cw(c76.689,125.197) 76.689,127.737 101.089,127.737 cw(c101.089,127.2) 101.625,127.2 101.625,125.171 cw(c99.085,125.171) 99.085,122.631 74.624,122.631 cw(c74.624,123.106)
GND on Bottom Layer "GND_L04_P019" (solid, pour order 19): 119.456,135.89 cw(c119.456,130.581) 124.765,130.581 124.765,90.041 cw(c119.458,90.041) 119.458,84.734 30.886,84.734 cw(c30.886,90.043) 25.578,90.043 25.578,130.58 cw(c30.888,130.58) 30.888,135.89 66.269,135.89

## Keep-outs
Keep-Out Layer:
  circle w0.3: c171,104 r2
  circle w0.3: c189,104 r2
  circle w0.3: c171,86 r2
  circle w0.3: c189,86 r2
  circle w0.3: c189,121 r2
  circle w0.3: c171,121 r2
  circle w0.3: c189,139 r2
  circle w0.3: c171,139 r2
  circle w0.3: c177,53 r2
  circle w0.3: c203,53 r2
  circle w0.3: c203,27 r2
  circle w0.3: c177,27 r2
  circle w0.3: c127,27 r2
  circle w0.3: c153,27 r2
  circle w0.3: c153,53 r2
  circle w0.3: c127,53 r2
  circle w0.3: c77,53 r2
  circle w0.3: c103,53 r2
  circle w0.3: c103,27 r2
  circle w0.3: c77,27 r2
  circle w0.3: c53,27 r2
  circle w0.3: c27,27 r2
  circle w0.3: c53,53 r2
  circle w0.3: c27,53 r2
  lines w0.3: 25.578,90.043 ccw(c30.888,90.043) 30.888,84.733 63.729,84.733 63.729,89.662 86.462,89.662 86.462,84.733 119.456,84.733 ccw(c119.456,90.043) 124.766,90.043 124.766,130.58 ccw(c119.456,130.58) 119.456,135.89 30.888,135.89 ccw(c30.888,130.58) 25.578,130.58 25.578,90.043
  lines w0.5: 27,23 cw(c27,27) 23,27 23,53 cw(c27,53) 27,57 53,57 ; 27,23 27,23 ; 27,23 53,23 ccw(c53,27) 57,27 57,53 ccw(c53,53) 53,57 ; 53,57 53,57 ; 171,108 ccw(c171,104) 167,104 167,86 ccw(c171,86) 171,82 189,82 ccw(c189,86) 193,86 193,104 ccw(c189,104) 189,108 171,108 ; 171,108 171,108 ; 171,143 ccw(c171,139) 167,139 167,121 ccw(c171,121) 171,117 189,117 ccw(c189,121) 193,121 193,139 ccw(c189,139) 189,143 171,143 ; 171,143 171,143 ; 73,27 ccw(c77,27) 77,23 103,23 ccw(c103,27) 107,27 107,53 ccw(c103,53) 103,57 77,57 ccw(c77,53) 73,53 73,27 ; 123,27 ccw(c127,27) 127,23 153,23 ccw(c153,27) 157,27 157,53 ccw(c153,53) 153,57 127,57 ccw(c127,53) 123,53 123,27 ; 173,27 ccw(c177,27) 177,23 203,23 ccw(c203,27) 207,27 207,53 ccw(c203,53) 203,57 177,57 ccw(c177,53) 173,53 173,27
  lines w1.5: 0,0 0,146.609 6.706,153.314 9.576,156.185 29.972,156.185 221.175,156.185 221.175,0 0,0

## Silkscreen, mask and mechanical layers (free items; w line width, h text height)
Top Overlay:
  text "VCC" at 38.452,127.85 h1
Bottom Overlay:
  text "BIAS" at 57.065,93.281 h1

## Text inside footprints (layer, text, board x,y; h text height)
H1: Top Overlay "B-F" at 29.515,93.396 h0.9 r90
J7: Mechanical 13 "Card Lock Position" at 104.681,83.921 h0.41 r180
LED2: Top Overlay "+" at 115.619,102.203 h0.8 r180
LED3: Top Overlay "+" at 111.501,106.345 h0.8 r270
M1: Mechanical 2 "No ground pad" at 121.261,117.751 h0.45 r270; Mechanical 3 "Toplayer no ground pad" at 115.376,117.936 h0.3 r270
U3: Top Overlay "*" at 66.169,105.921 h1.27 r270; Mechanical 13 "*" at 64.988,104.816 h1.27 r270; Mechanical 7 "0.05in/1.27mm" at 58.283,107.413 h0.64 r270; Mechanical 7 "0.05in/1.27mm" at 64.785,112.525 h0.64 r270; Mechanical 7 "0.197in/5.004mm" at 63.515,97.844 h0.64 r270; Mechanical 7 "0.157in/3.988mm" at 68.748,105.267 h0.64 r270
U4: Top Overlay "*" at 41.969,127.115 h1.27; Mechanical 13 "*" at 42.56,126.048 h1.27